# Altium PCB standos_rpi_com — копия.PcbDoc (part 1 of 2)
Units mm, origin at the board's own origin, x right, y up, seen from the top; angles counter-clockwise.
Board outline 197 x 179 mm, 2 copper layers (Top Layer, Bottom Layer); 29 components, 567 nets, 1552 pads, 0 vias.
Unrouted connection lines stored in the file: 121.
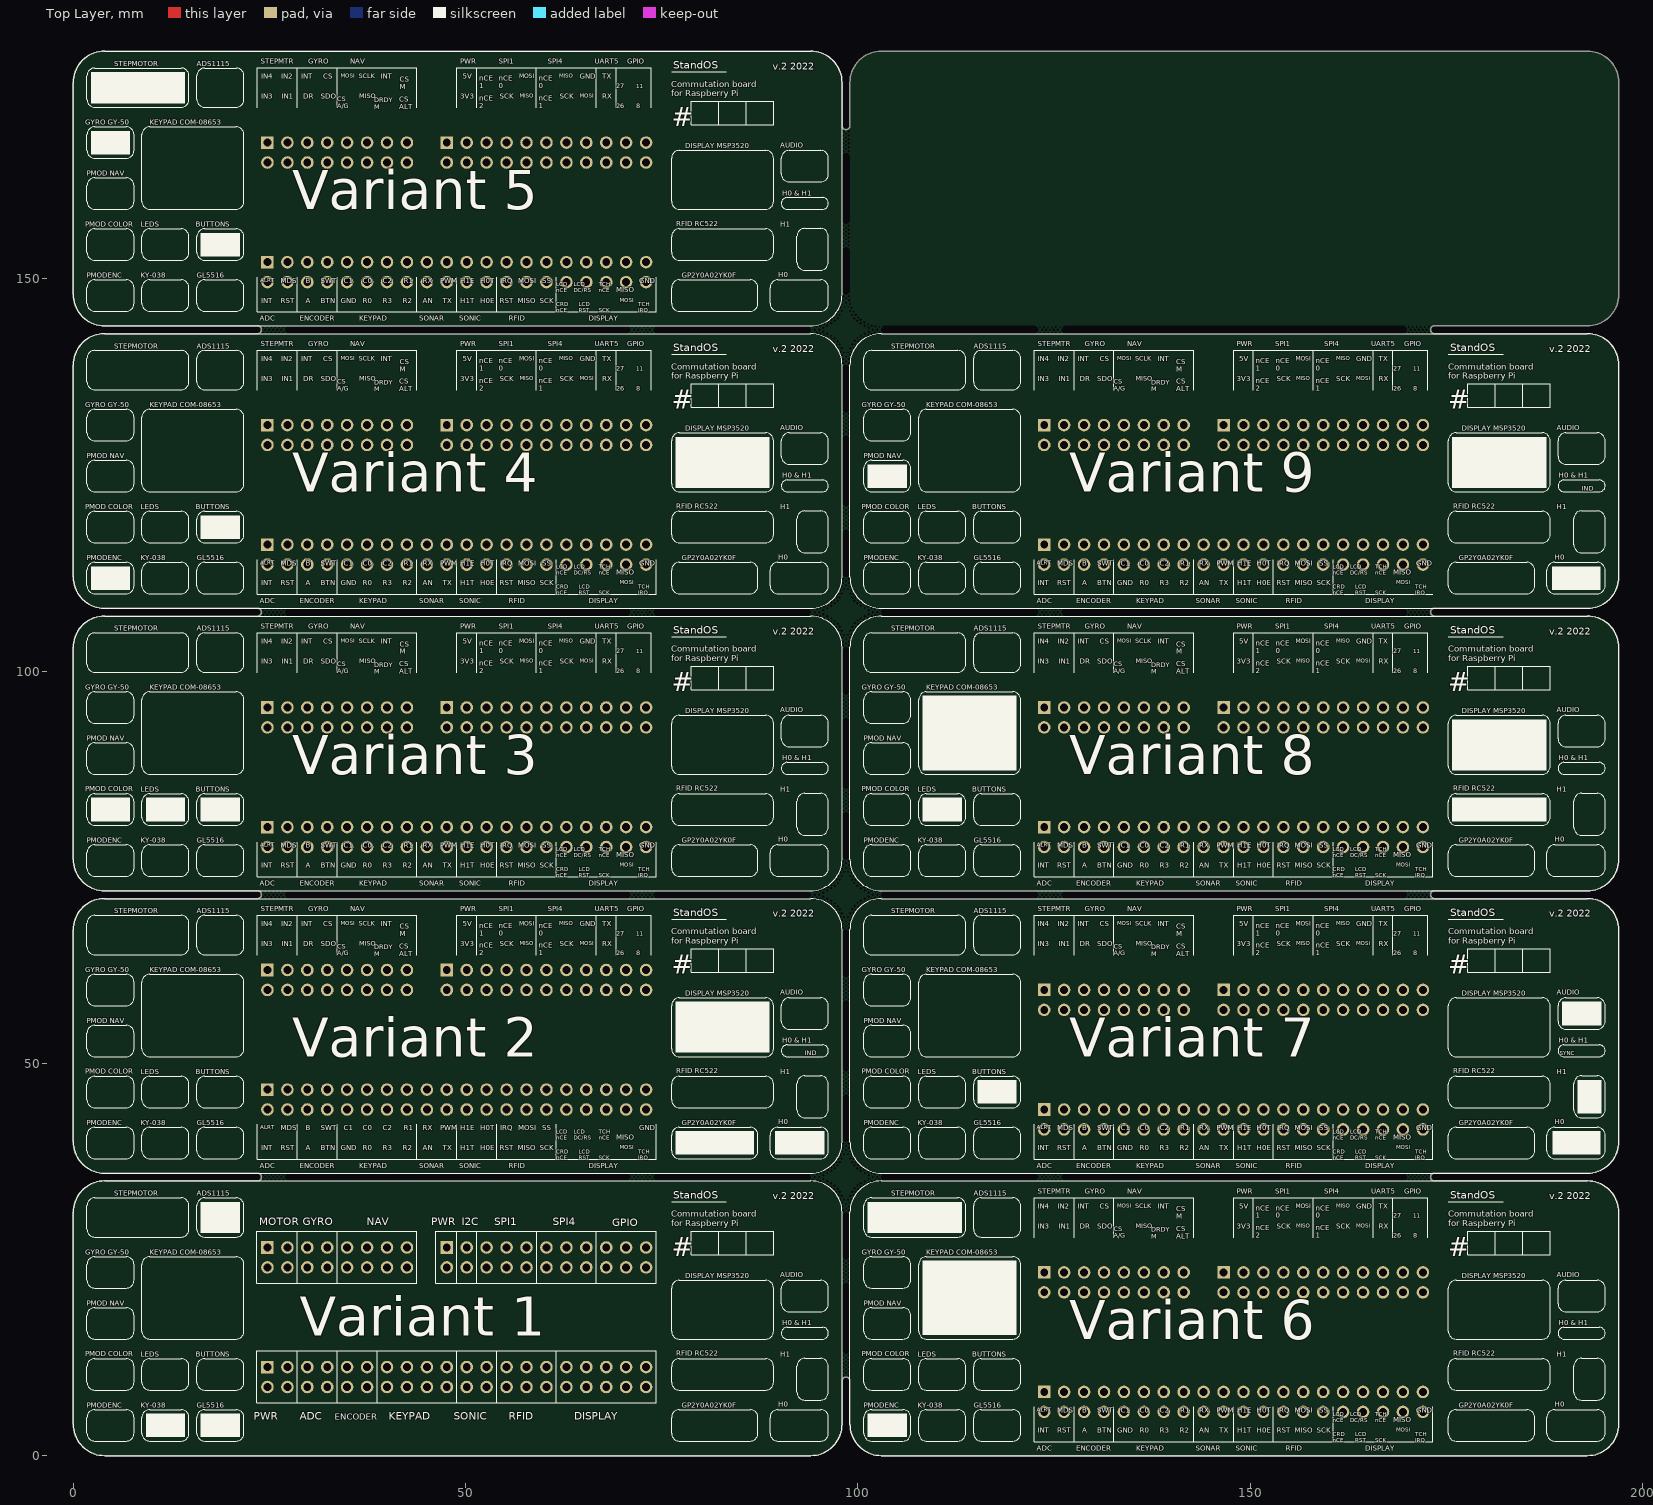
[diagram p0: Top Layer view]
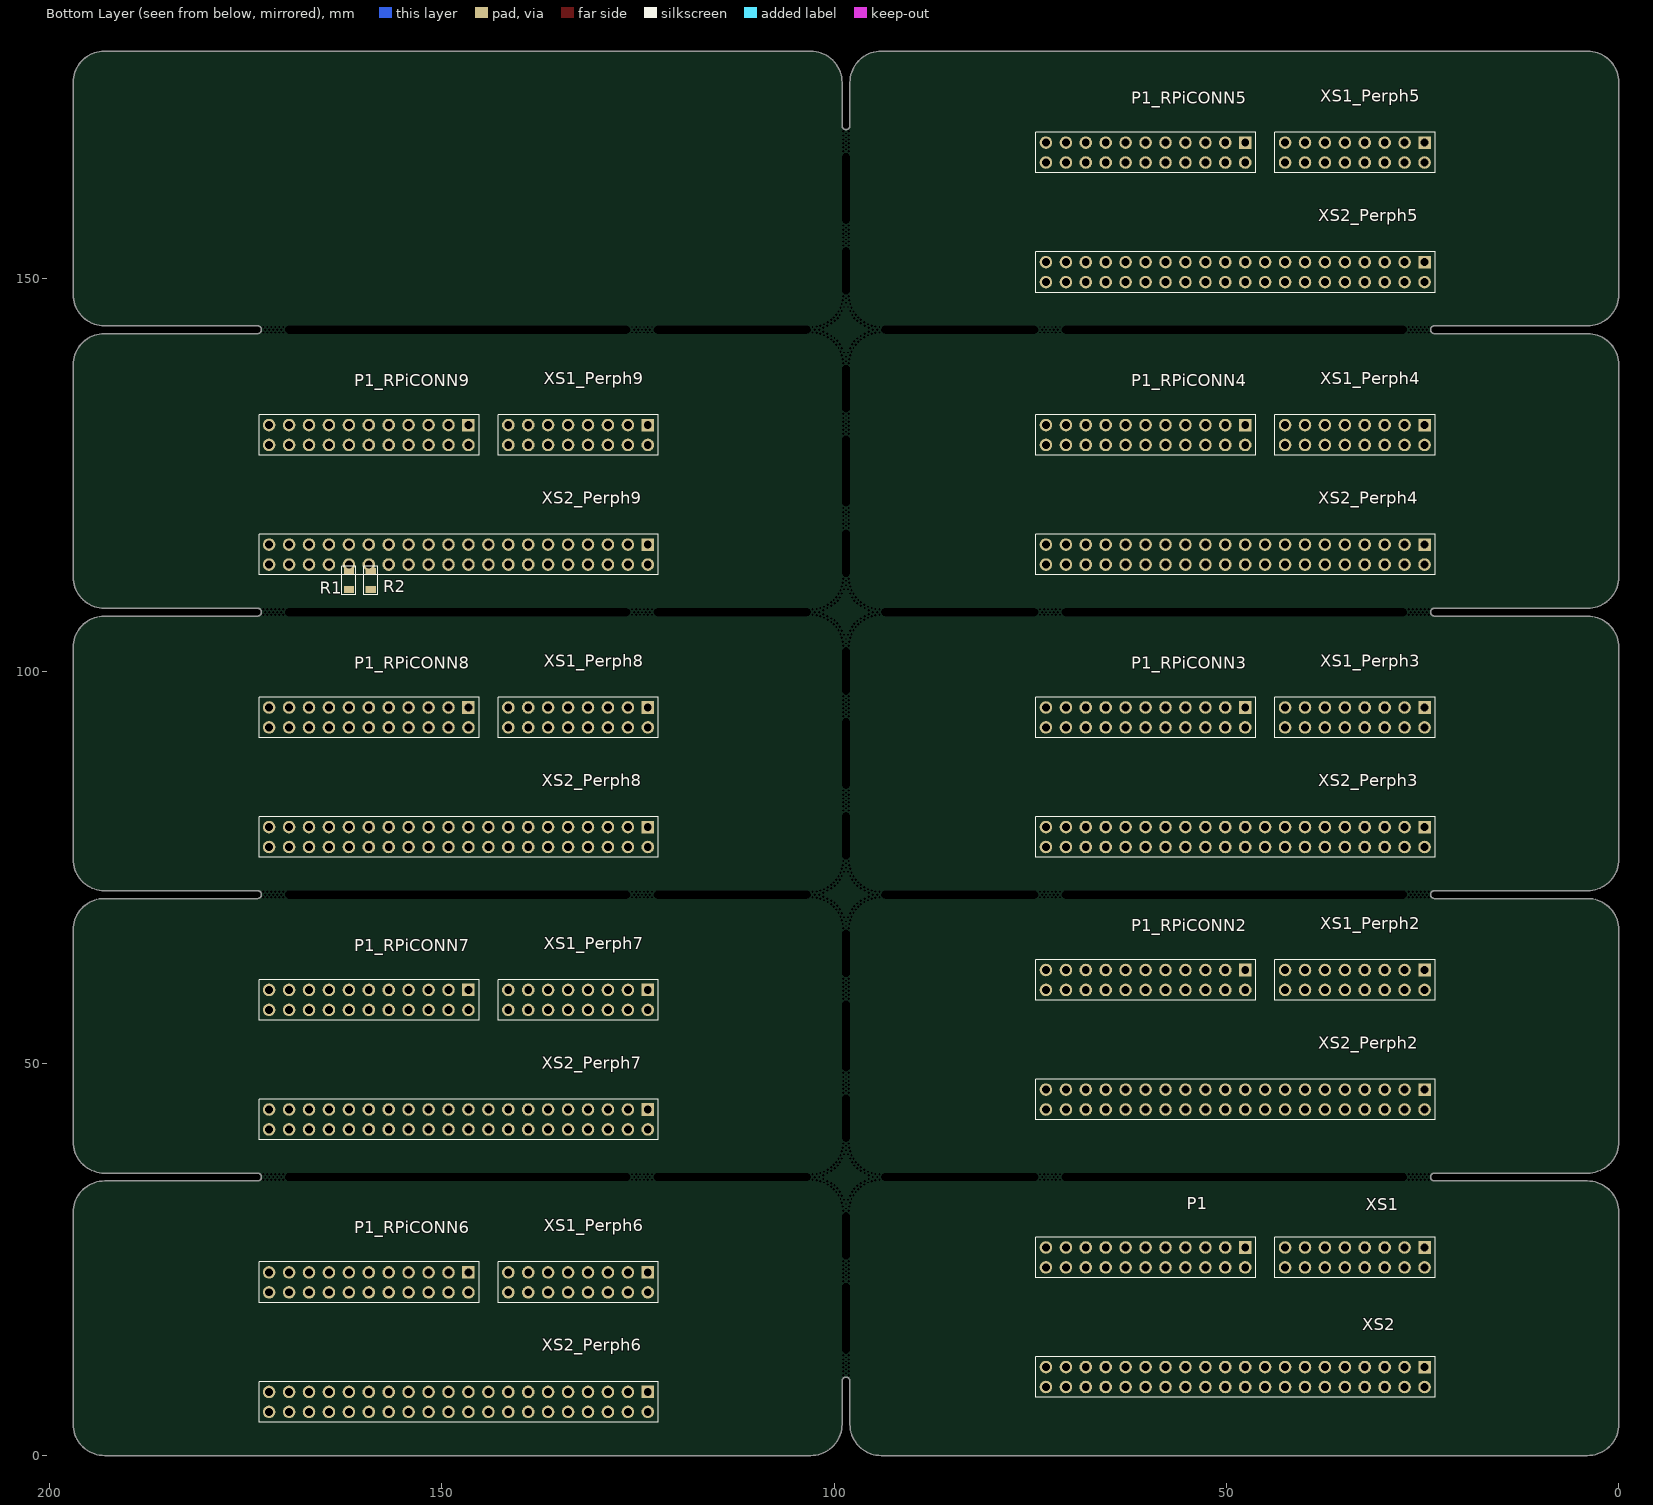
[diagram p1: Bottom Layer view, seen from below]

## Layer stack, top to bottom
Top Solder: solder mask 0.0102, Solder Resist, Dk 3.5
Top Layer: signal copper 0.0356
Dielectric 1: dielectric 0.32, FR-4, Dk 4.8
Bottom Layer: signal copper 0.0356
Bottom Solder: solder mask 0.0102, Solder Resist, Dk 3.5

## Board outline
4,0 cw(c4,4) 0,4 0,31 cw(c4,31) 4,35 23.5,35 ccw(c23.5,35.5) 23.5,36 4,36 cw(c4,40) 0,40 0,67 cw(c4,67) 4,71 23.5,71 ccw(c23.5,71.5) 23.5,72 4,72 cw(c4,76) 0,76 0,103 cw(c4,103) 4,107 23.5,107 ccw(c23.5,107.5) 23.5,108 4,108 cw(c4,112) 0,112 0,139 cw(c4,139) 4,143 23.5,143 ccw(c23.5,143.5) 23.5,144 4,144 cw(c4,148) 0,148 0,175 cw(c4,175) 4,179 94,179 cw(c94,175) 98,175 98,169.5 ccw(c98.5,169.5) 99,169.5 99,175 cw(c103,175) 103,179 193,179 cw(c193,175) 197,175 197,148 cw(c193,148) 193,144 173.5,144 ccw(c173.5,143.5) 173.5,143 193,143 cw(c193,139) 197,139 197,112 cw(c193,112) 193,108 173.5,108 ccw(c173.5,107.5) 173.5,107 193,107 cw(c193,103) 197,103 197,76 cw(c193,76) 193,72 173.5,72 ccw(c173.5,71.5) 173.5,71 193,71 cw(c193,67) 197,67 197,40 cw(c193,40) 193,36 173.5,36 ccw(c173.5,35.5) 173.5,35 193,35 cw(c193,31) 197,31 197,4 cw(c193,4) 193,0 103,0 cw(c103,4) 99,4 99,9.5 ccw(c98.5,9.5) 98,9.5 98,4 cw(c94,4) 94,0

## Design rules (kind name [scope] priority, off if disabled: settings)
Clearance [All] p1: gap=0.2 ignorepadtopadclearanceinfootprint=FALSE except(0: Arc-Hole Track-Hole SMDPad-Hole THPad-Hole Via-Hole Fill-Hole Poly-Hole Region-Hole Text-Hole)
HoleSize [All] p1: absolutevalues=TRUE maxlimit=30 minlimit=0.3 maxpercent=80.000 minpercent=20.000
HoleToHoleClearance [All] p1: gap=0.1 allowstackedmicrovias=TRUE
PolygonConnect [All] p1: connectstyle=Relief reliefconductorwidth=0.254 reliefentries=4 polygonreliefangle="90 Angle" airgapwidth=0.254
RoutingVias [All] p1: holewidth=0.3 width=0.5 viastyle="Through Hole" minholewidth=0.3 minwidth=0.5 maxholewidth=1 maxwidth=1
SilkToSilkClearance [All] p1: silktosilkclearance=0.1
SilkToSolderMaskClearance [IsPad] p1: minsilkscreentomaskgap=0.1 clearancetoexposedcopper=TRUE
SolderMaskExpansion [All] p1: expansion=0.102 istentingtop=FALSE
Width [All] p1: maxlimit=2 minlimit=0.2 preferedwidth=0.3 minimp=50.000000 maximp=50.000000 favimp=50.000000
26 further rules are at their usual default settings.

## Classes and differential pairs
component class "Variant 9": R1 R2
component class RPiCONN9: P1_RPiCONN9
component class RPiCONN8: P1_RPiCONN8
component class RPiCONN7: P1_RPiCONN7
component class RPiCONN6: P1_RPiCONN6
component class RPiCONN5: P1_RPiCONN5
component class RPiCONN4: P1_RPiCONN4
component class Perph9: XS1_Perph9 XS2_Perph9
component class Perph8: XS1_Perph8 XS2_Perph8
component class Perph7: XS1_Perph7 XS2_Perph7
component class Perph6: XS1_Perph6 XS2_Perph6
component class Perph5: XS1_Perph5 XS2_Perph5
component class Perph4: XS1_Perph4 XS2_Perph4
component class RPiCONN3: P1_RPiCONN3
component class RPiCONN1: P1
component class RPiCONN2: P1_RPiCONN2
component class Perph3: XS1_Perph3 XS2_Perph3
component class Perph2: XS1_Perph2 XS2_Perph2
channel class RPi_connector: RPiCONN1 RPiCONN2 RPiCONN3 RPiCONN4 RPiCONN5 RPiCONN6 RPiCONN7 RPiCONN8 RPiCONN9
channel class Perph_connectors: Perph1 Perph2 Perph3 Perph4 Perph5 Perph6 Perph7 Perph8 Perph9
component class Perph1: XS1 XS2

## Components (designator, comment, footprint, x,y, rotation, side; value= is the part's Value field where it differs from the comment)
P1 "PLD-22" PLD-22 47.62,26.525 r0 bottom
P1_RPiCONN2 "PLD-22" PLD-22 47.62,61.89 r0 bottom (schematic designator P1)
P1_RPiCONN3 "PLD-22" PLD-22 47.62,95.35 r0 bottom (schematic designator P1)
P1_RPiCONN4 "PLD-22" PLD-22 47.62,131.35 r0 bottom (schematic designator P1)
P1_RPiCONN5 "PLD-22" PLD-22 47.62,167.35 r0 bottom (schematic designator P1)
P1_RPiCONN6 "PLD-22" PLD-22 146.62,23.35 r0 bottom (schematic designator P1)
P1_RPiCONN7 "PLD-22" PLD-22 146.62,59.35 r0 bottom (schematic designator P1)
P1_RPiCONN8 "PLD-22" PLD-22 146.62,95.35 r0 bottom (schematic designator P1)
P1_RPiCONN9 "PLD-22" PLD-22 146.62,131.35 r0 bottom (schematic designator P1)
R1 "R0805" R0805 161.86,111.55 r270 bottom value=10K
R2 "R0805" R0805 159.06,111.55 r90 bottom value=NC
XS1 "PLD-16" PLD-16 24.76,26.525 r0 bottom
XS1_Perph2 "PLD-16" PLD-16 24.76,61.89 r0 bottom (schematic designator XS1)
XS1_Perph3 "PLD-16" PLD-16 24.76,95.35 r0 bottom (schematic designator XS1)
XS1_Perph4 "PLD-16" PLD-16 24.76,131.35 r0 bottom (schematic designator XS1)
XS1_Perph5 "PLD-16" PLD-16 24.76,167.35 r0 bottom (schematic designator XS1)
XS1_Perph6 "PLD-16" PLD-16 123.76,23.35 r0 bottom (schematic designator XS1)
XS1_Perph7 "PLD-16" PLD-16 123.76,59.35 r0 bottom (schematic designator XS1)
XS1_Perph8 "PLD-16" PLD-16 123.76,95.35 r0 bottom (schematic designator XS1)
XS1_Perph9 "PLD-16" PLD-16 123.76,131.35 r0 bottom (schematic designator XS1)
XS2 "PLD-40" PLD-40 24.76,11.285 r0 bottom
XS2_Perph2 "PLD-40" PLD-40 24.76,46.65 r0 bottom (schematic designator XS2)
XS2_Perph3 "PLD-40" PLD-40 24.76,80.11 r0 bottom (schematic designator XS2)
XS2_Perph4 "PLD-40" PLD-40 24.76,116.11 r0 bottom (schematic designator XS2)
XS2_Perph5 "PLD-40" PLD-40 24.76,152.11 r0 bottom (schematic designator XS2)
XS2_Perph6 "PLD-40" PLD-40 123.76,8.11 r0 bottom (schematic designator XS2)
XS2_Perph7 "PLD-40" PLD-40 123.76,44.11 r0 bottom (schematic designator XS2)
XS2_Perph8 "PLD-40" PLD-40 123.76,80.11 r0 bottom (schematic designator XS2)
XS2_Perph9 "PLD-40" PLD-40 123.76,116.11 r0 bottom (schematic designator XS2)

## Footprints (in the part's own frame and the unit in brackets; to place one, negate y for a bottom-side part, rotate by r counter-clockwise, add the part's x,y. Pads: shape width x height; smd on the part's side, far side on the other; paste and mask are expansions set on the pad)
PLD-16 [mm]
  rect 1.6x1.6 hole 1: 1(0,0)
  round 1.6 hole 1: 2(0,2.54) 3(2.54,0) 4(2.54,2.54) 5(5.08,0) 6(5.08,2.54) 7(7.62,0) 8(7.62,2.54) 9(10.16,0) 10(10.16,2.54) 11(12.7,0) 12(12.7,2.54) 13(15.24,0) 14(15.24,2.54) 15(17.78,0) 16(17.78,2.54)
  silkscreen extent -1.36,-1.33 19.07,3.87, body extent -1.29,-1.26 19.03,3.82, height 8.54
PLD-22 [mm]
  rect 1.6x1.6 hole 1: 1(0,0)
  round 1.6 hole 1: 2(0,2.54) 3(2.54,0) 4(2.54,2.54) 5(5.08,0) 6(5.08,2.54) 7(7.62,0) 8(7.62,2.54) 9(10.16,0) 10(10.16,2.54) 11(12.7,0) 12(12.7,2.54) 13(15.24,0) 14(15.24,2.54) 15(17.78,0) 16(17.78,2.54) 17(20.32,0) 18(20.32,2.54) 19(22.86,0) 20(22.86,2.54) 21(25.4,0) 22(25.4,2.54)
  silkscreen extent -1.36,-1.33 26.67,3.87, body extent -1.29,-1.26 26.65,3.82, height 8.54
PLD-40 [mm]
  rect 1.6x1.6 hole 1: 1(0,0)
  round 1.6 hole 1: 2(0,2.54) 3(2.54,0) 4(2.54,2.54) 5(5.08,0) 6(5.08,2.54) 7(7.62,0) 8(7.62,2.54) 9(10.16,0) 10(10.16,2.54) 11(12.7,0) 12(12.7,2.54) 13(15.24,0) 14(15.24,2.54) 15(17.78,0) 16(17.78,2.54) 17(20.32,0) 18(20.32,2.54) 19(22.86,0) 20(22.86,2.54) 21(25.4,0) 22(25.4,2.54) 23(27.94,0) 24(27.94,2.54) 25(30.48,0) 26(30.48,2.54) 27(33.02,0) 28(33.02,2.54) 29(35.56,0) 30(35.56,2.54) 31(38.1,0) 32(38.1,2.54) 33(40.64,0) 34(40.64,2.54) 35(43.18,0) 36(43.18,2.54) 37(45.72,0) 38(45.72,2.54) 39(48.26,0) 40(48.26,2.54)
  silkscreen extent -1.36,-1.33 49.55,3.87, body extent -1.29,-1.26 49.51,3.82, height 8.54
R0805 [mm]
  rect 0.9x1.3 smd: 1(-1.15,0) 2(1.15,0)
  silkscreen extent -1.8,-0.9 1.8,0.9, body extent -1.4,-0.62 1.4,0.63, height 0.8

## Free pads (board coordinates)
  round 0 hole 1 slot 44 at 0 deg unplated: 17(49,35.5) 17(49,71.5) 17(49,107.5) 17(49,143.5) 17(148,35.5) 17(148,71.5) 17(148,107.5) 17(148,143.5)
  round 0 hole 1 slot 20 at 0 deg unplated: 17(84,35.5) 17(84,71.5) 17(84,107.5) 17(84,143.5) 17(113,35.5) 17(113,71.5) 17(113,107.5) 17(113,143.5)
  round 0 hole 1 slot 9 at 90 deg unplated: 17(98.5,17.5) 17(98.5,53.5) 17(98.5,89.5) 17(98.5,125.5) 17(98.5,161.5)
  round 0 hole 1 slot 6 at 90 deg unplated: 17(98.5,28) 17(98.5,43) 17(98.5,64) 17(98.5,79) 17(98.5,100) 17(98.5,115) 17(98.5,136) 17(98.5,151)
  round 0 hole 0.3 unplated mask+0.102: ""(24.225,35.15) ""(24.225,35.85) ""(24.225,71.15) ""(24.225,71.85) ""(24.225,107.15) ""(24.225,107.85) ""(24.225,143.15) ""(24.225,143.85) ""(24.5,35.501) ""(24.5,71.501) ""(24.5,107.501) ""(24.5,143.501) ""(24.75,35.15) ""(24.75,35.85) ""(24.75,71.15) ""(24.75,71.85) ""(24.75,107.15) ""(24.75,107.85) ""(24.75,143.15) ""(24.75,143.85) ""(25,35.501) ""(25,71.501) ""(25,107.501) ""(25,143.501) ""(25.25,35.15) ""(25.25,35.85) ""(25.25,71.15) ""(25.25,71.85) ""(25.25,107.15) ""(25.25,107.85) ""(25.25,143.15) ""(25.25,143.85) ""(25.5,35.501) ""(25.5,71.501) ""(25.5,107.501) ""(25.5,143.501) ""(25.75,35.15) ""(25.75,35.85) ""(25.75,71.15) ""(25.75,71.85) ""(25.75,107.15) ""(25.75,107.85) ""(25.75,143.15) ""(25.75,143.85) ""(26,35.501) ""(26,71.501) ""(26,107.501) ""(26,143.501) ""(26.25,35.15) ""(26.25,35.85) ""(26.25,71.15) ""(26.25,71.85) ""(26.25,107.15) ""(26.25,107.85) ""(26.25,143.15) ""(26.25,143.85) ""(26.5,35.501) ""(26.5,71.501) ""(26.5,107.501) ""(26.5,143.501) ""(26.775,35.15) ""(26.775,35.85) ""(26.775,71.15) ""(26.775,71.85) ""(26.775,107.15) ""(26.775,107.85) ""(26.775,143.15) ""(26.775,143.85) ""(71.225,35.15) ""(71.225,35.85) ""(71.225,71.15) ""(71.225,71.85) ""(71.225,107.15) ""(71.225,107.85) ""(71.225,143.15) ""(71.225,143.85) ""(71.5,35.501) ""(71.5,71.501) ""(71.5,107.501) ""(71.5,143.501) ""(71.75,35.15) ""(71.75,35.85) ""(71.75,71.15) ""(71.75,71.85) ""(71.75,107.15) ""(71.75,107.85) ""(71.75,143.15) ""(71.75,143.85) ""(72,35.501) ""(72,71.501) ""(72,107.501) ""(72,143.501) ""(72.25,35.15) ""(72.25,35.85) ""(72.25,71.15) ""(72.25,71.85) ""(72.25,107.15) ""(72.25,107.85) ""(72.25,143.15) ""(72.25,143.85) ""(72.5,35.501) ""(72.5,71.501) ""(72.5,107.501) ""(72.5,143.501) ""(72.75,35.15) ""(72.75,35.85) ""(72.75,71.15) ""(72.75,71.85) ""(72.75,107.15) ""(72.75,107.85) ""(72.75,143.15) ""(72.75,143.85) ""(73,35.501) ""(73,71.501) ""(73,107.501) ""(73,143.501) ""(73.25,35.15) ""(73.25,35.85) ""(73.25,71.15) ""(73.25,71.85) ""(73.25,107.15) ""(73.25,107.85) ""(73.25,143.15) ""(73.25,143.85) ""(73.5,35.501) ""(73.5,71.501) ""(73.5,107.501) ""(73.5,143.501) ""(73.775,35.15) ""(73.775,35.85) ""(73.775,71.15) ""(73.775,71.85) ""(73.775,107.15) ""(73.775,107.85) ""(73.775,143.15) ""(73.775,143.85) ""(94.225,35.15) ""(94.225,35.85) ""(94.225,71.15) ""(94.225,71.85) ""(94.225,107.15) ""(94.225,107.85) ""(94.225,143.15) ""(94.225,143.85) ""(94.5,35.501) ""(94.5,71.501) ""(94.5,107.501) ""(94.5,143.501) ""(94.75,35.1) ""(94.75,35.9) ""(94.75,71.1) ""(94.75,71.9) ""(94.75,107.1) ""(94.75,107.9) ""(94.75,143.1) ""(94.75,143.9) ""(95.075,35.5) ""(95.075,71.5) ""(95.075,107.5) ""(95.075,143.5) ""(95.225,34.975) ""(95.225,36.025) ""(95.225,70.975) ""(95.225,72.025) ""(95.225,106.975) ""(95.225,108.025) ""(95.225,142.975) ""(95.225,144.025) ""(95.6,35.25) ""(95.6,35.75) ""(95.6,71.25) ""(95.6,71.75) ""(95.6,107.25) ""(95.6,107.75) ""(95.6,143.25) ""(95.6,143.75) ""(95.7,34.8) ""(95.7,36.2) ""(95.7,70.8) ""(95.7,72.2) ""(95.7,106.8) ""(95.7,108.2) ""(95.7,142.8) ""(95.7,144.2) ""(96.125,34.975) ""(96.125,36.025) ""(96.125,70.975) ""(96.125,72.025) ""(96.125,106.975) ""(96.125,108.025) ""(96.125,142.975) ""(96.125,144.025) ""(96.175,34.55) ""(96.175,36.45) ""(96.175,70.55) ""(96.175,72.45) ""(96.175,106.55) ""(96.175,108.45) ""(96.175,142.55) ""(96.175,144.45) ""(96.6,34.25) ""(96.6,36.75) ""(96.6,70.25) ""(96.6,70.25) ""(96.6,72.75) ""(96.6,106.25) ""(96.6,108.75) ""(96.6,142.25) ""(96.6,142.25) ""(96.6,144.75) ""(96.6,178.25) ""(96.625,34.7) ""(96.625,36.3) ""(96.625,70.7) ""(96.625,72.3) ""(96.625,106.7) ""(96.625,108.3) ""(96.625,142.7) ""(96.625,144.3) ""(96.95,33.95) ""(96.95,37.05) ""(96.95,69.95) ""(96.95,73.05) ""(96.95,105.95) ""(96.95,109.05) ""(96.95,141.95) ""(96.95,145.05) ""(97.075,34.375) ""(97.075,36.625) ""(97.075,70.375) ""(97.075,72.625) ""(97.075,106.375) ""(97.075,108.625) ""(97.075,142.375) ""(97.075,144.625) ""(97.25,33.6) ""(97.25,37.4) ""(97.25,69.6) ""(97.25,73.4) ""(97.25,105.6) ""(97.25,109.4) ""(97.25,141.6) ""(97.25,145.4) ""(97.45,34.025) ""(97.45,36.975) ""(97.45,70.025) ""(97.45,72.975) ""(97.45,106.025) ""(97.45,108.975) ""(97.45,142.025) ""(97.45,144.975) ""(97.55,33.175) ""(97.55,37.825) ""(97.55,69.175) ""(97.55,73.825) ""(97.55,105.175) ""(97.55,109.825) ""(97.55,141.175) ""(97.55,145.825) ""(97.7,33.625) ""(97.7,37.375) ""(97.7,69.625) ""(97.7,73.375) ""(97.7,105.625) ""(97.7,109.375) ""(97.7,141.625) ""(97.7,145.375) ""(97.8,32.7) ""(97.8,38.3) ""(97.8,68.7) ""(97.8,74.3) ""(97.8,104.7) ""(97.8,110.3) ""(97.8,140.7) ""(97.8,146.3) ""(97.975,32.225) ""(97.975,33.125) ""(97.975,37.875) ""(97.975,38.775) ""(97.975,68.225) ""(97.975,69.125) ""(97.975,73.875) ""(97.975,74.775) ""(97.975,104.225) ""(97.975,105.125) ""(97.975,109.875) ""(97.975,110.775) ""(97.975,140.225) ""(97.975,141.125) ""(97.975,145.875) ""(97.975,146.775) ""(98.1,31.75) ""(98.1,39.25) ""(98.1,67.75) ""(98.1,75.25) ""(98.1,103.75) ""(98.1,111.25) ""(98.1,139.75) ""(98.1,147.25) ""(98.15,10.225) ""(98.15,10.75) ""(98.15,11.25) ""(98.15,11.75) ""(98.15,12.25) ""(98.15,12.775) ""(98.15,22.225) ""(98.15,22.75) ""(98.15,23.25) ""(98.15,23.75) ""(98.15,24.25) ""(98.15,24.775) ""(98.15,31.225) ""(98.15,39.775) ""(98.15,46.225) ""(98.15,46.75) ""(98.15,47.25) ""(98.15,47.75) ""(98.15,48.25) ""(98.15,48.775) ""(98.15,58.225) ""(98.15,58.75) ""(98.15,59.25) ""(98.15,59.75) ""(98.15,60.25) ""(98.15,60.775) ""(98.15,67.225) ""(98.15,75.775) ""(98.15,82.225) ""(98.15,82.75) ""(98.15,83.25) ""(98.15,83.75) ""(98.15,84.25) ""(98.15,84.775) ""(98.15,94.225) ""(98.15,94.75) ""(98.15,95.25) ""(98.15,95.75) ""(98.15,96.25) ""(98.15,96.775) ""(98.15,103.225) ""(98.15,111.775) ""(98.15,118.225) ""(98.15,118.75) ""(98.15,119.25) ""(98.15,119.75) ""(98.15,120.25) ""(98.15,120.775) ""(98.15,130.225) ""(98.15,130.75) ""(98.15,131.25) ""(98.15,131.75) ""(98.15,132.25) ""(98.15,132.775) ""(98.15,139.225) ""(98.15,147.775) ""(98.15,154.225) ""(98.15,154.75) ""(98.15,155.25) ""(98.15,155.75) ""(98.15,156.25) ""(98.15,156.775) ""(98.15,166.225) ""(98.15,166.75) ""(98.15,167.25) ""(98.15,167.75) ""(98.15,168.25) ""(98.15,168.775) ""(98.25,32.6) ""(98.25,38.4) ""(98.25,68.6) ""(98.25,74.4) ""(98.25,104.6) ""(98.25,110.4) ""(98.25,140.6) ""(98.25,146.4) ""(98.499,10.5) ""(98.499,11) ""(98.499,11.5) ""(98.499,12) ""(98.499,12.5) ""(98.499,22.5) ""(98.499,23) ""(98.499,23.5) ""(98.499,24) ""(98.499,24.5) ""(98.499,31.5) ""(98.499,39.5) ""(98.499,46.5) ""(98.499,47) ""(98.499,47.5) ""(98.499,48) ""(98.499,48.5) ""(98.499,58.5) ""(98.499,59) ""(98.499,59.5) ""(98.499,60) ""(98.499,60.5) ""(98.499,67.5) ""(98.499,75.5) ""(98.499,82.5) ""(98.499,83) ""(98.499,83.5) ""(98.499,84) ""(98.499,84.5) ""(98.499,94.5) ""(98.499,95) ""(98.499,95.5) ""(98.499,96) ""(98.499,96.5) ""(98.499,103.5) ""(98.499,111.5) ""(98.499,118.5) ""(98.499,119) ""(98.499,119.5) ""(98.499,120) ""(98.499,120.5) ""(98.499,130.5) ""(98.499,131) ""(98.499,131.5) ""(98.499,132) ""(98.499,132.5) ""(98.499,139.5) ""(98.499,147.5) ""(98.499,154.5) ""(98.499,155) ""(98.499,155.5) ""(98.499,156) ""(98.499,156.5) ""(98.499,166.5) ""(98.499,167) ""(98.499,167.5) ""(98.499,168) ""(98.499,168.5) ""(98.5,32.075) ""(98.5,38.925) ""(98.5,68.075) ""(98.5,74.925) ""(98.5,104.075) ""(98.5,110.925) ""(98.5,140.075) ""(98.5,146.925) ""(98.75,32.6) ""(98.75,38.4) ""(98.75,68.6) ""(98.75,74.4) ""(98.75,104.6) ""(98.75,110.4) ""(98.75,140.6) ""(98.75,146.4) ""(98.85,10.225) ""(98.85,10.75) ""(98.85,11.25) ""(98.85,11.75) ""(98.85,12.25) ""(98.85,12.775) ""(98.85,22.225) ""(98.85,22.75) ""(98.85,23.25) ""(98.85,23.75) ""(98.85,24.25) ""(98.85,24.775) ""(98.85,46.225) ""(98.85,46.75) ""(98.85,47.25) ""(98.85,47.75) ""(98.85,48.25) ""(98.85,48.775) ""(98.85,58.225) ""(98.85,58.75) ""(98.85,59.25) ""(98.85,59.75) ""(98.85,60.25) ""(98.85,60.775) ""(98.85,82.225) ""(98.85,82.75) ""(98.85,83.25) ""(98.85,83.75) ""(98.85,84.25) ""(98.85,84.775) ""(98.85,94.225) ""(98.85,94.75) ""(98.85,95.25) ""(98.85,95.75) ""(98.85,96.25) ""(98.85,96.775) ""(98.85,118.225) ""(98.85,118.75) ""(98.85,119.25) ""(98.85,119.75) ""(98.85,120.25) ""(98.85,120.775) ""(98.85,130.225) ""(98.85,130.75) ""(98.85,131.25) ""(98.85,131.75) ""(98.85,132.25) ""(98.85,132.775) ""(98.85,154.225) ""(98.85,154.75) ""(98.85,155.25) ""(98.85,155.75) ""(98.85,156.25) ""(98.85,156.775) ""(98.85,166.225) ""(98.85,166.75) ""(98.85,167.25) ""(98.85,167.75) ""(98.85,168.25) ""(98.85,168.775) ""(98.85,31.225) ""(98.85,39.775) ""(98.85,67.225) ""(98.85,75.775) ""(98.85,103.225) ""(98.85,111.775) ""(98.85,139.225) ""(98.85,147.775) ""(98.9,31.75) ""(98.9,39.25) ""(98.9,67.75) ""(98.9,75.25) ""(98.9,103.75) ""(98.9,111.25) ""(98.9,139.75) ""(98.9,147.25) ""(99.025,32.225) ""(99.025,33.125) ""(99.025,37.875) ""(99.025,38.775) ""(99.025,68.225) ""(99.025,69.125) ""(99.025,73.875) ""(99.025,74.775) ""(99.025,104.225) ""(99.025,105.125) ""(99.025,109.875) ""(99.025,110.775) ""(99.025,140.225) ""(99.025,141.125) ""(99.025,145.875) ""(99.025,146.775) ""(99.2,32.7) ""(99.2,38.3) ""(99.2,68.7) ""(99.2,74.3) ""(99.2,104.7) ""(99.2,110.3) ""(99.2,140.7) ""(99.2,146.3) ""(99.3,33.625) ""(99.3,37.375) ""(99.3,69.625) ""(99.3,73.375) ""(99.3,105.625) ""(99.3,109.375) ""(99.3,141.625) ""(99.3,145.375) ""(99.45,33.175) ""(99.45,37.825) ""(99.45,69.175) ""(99.45,73.825) ""(99.45,105.175) ""(99.45,109.825) ""(99.45,141.175) ""(99.45,145.825) ""(99.55,36.975) ""(99.55,72.975) ""(99.55,108.975) ""(99.55,144.975) ""(99.625,34.075) ""(99.625,70.075) ""(99.625,106.075) ""(99.625,142.075) ""(99.75,33.6) ""(99.75,37.4) ""(99.75,69.6) ""(99.75,73.4) ""(99.75,105.6) ""(99.75,109.4) ""(99.75,141.6) ""(99.75,145.4) ""(99.925,36.625) ""(99.925,72.625) ""(99.925,108.625) ""(99.925,144.625) ""(99.975,34.45) ""(99.975,70.45) ""(99.975,106.45) ""(99.975,142.45) ""(100.05,33.95) ""(100.05,37.05) ""(100.05,69.95) ""(100.05,73.05) ""(100.05,105.95) ""(100.05,109.05) ""(100.05,141.95) ""(100.05,145.05) ""(100.375,36.3) ""(100.375,72.3) ""(100.375,108.3) ""(100.375,144.3) ""(100.375,34.7) ""(100.375,70.7) ""(100.375,106.7) ""(100.375,142.7) ""(100.4,36.75) ""(100.4,72.75) ""(100.4,108.75) ""(100.4,144.75) ""(100.4,34.25) ""(100.4,70.25) ""(100.4,106.25) ""(100.4,142.25) ""(100.825,36.45) ""(100.825,72.45) ""(100.825,108.45) ""(100.825,144.45) ""(100.825,34.55) ""(100.825,70.55) ""(100.825,106.55) ""(100.825,142.55) ""(100.875,36.025) ""(100.875,72.025) ""(100.875,108.025) ""(100.875,144.025) ""(100.875,34.975) ""(100.875,70.975) ""(100.875,106.975) ""(100.875,142.975) ""(101.3,36.2) ""(101.3,72.2) ""(101.3,108.2) ""(101.3,144.2) ""(101.3,34.8) ""(101.3,70.8) ""(101.3,106.8) ""(101.3,142.8) ""(101.4,35.75) ""(101.4,71.75) ""(101.4,107.75) ""(101.4,143.75) ""(101.4,35.25) ""(101.4,71.25) ""(101.4,107.25) ""(101.4,143.25) ""(101.775,36.025) ""(101.775,72.025) ""(101.775,108.025) ""(101.775,144.025) ""(101.775,34.975) ""(101.775,70.975) ""(101.775,106.975) ""(101.775,142.975) ""(101.925,35.5) ""(101.925,71.5) ""(101.925,107.5) ""(101.925,143.5) ""(102.25,35.9) ""(102.25,71.9) ""(102.25,107.9) ""(102.25,143.9) ""(102.25,35.1) ""(102.25,71.1) ""(102.25,107.1) ""(102.25,143.1) ""(102.5,35.499) ""(102.5,71.499) ""(102.5,107.499) ""(102.5,143.499) ""(102.775,35.85) ""(102.775,71.85) ""(102.775,107.85) ""(102.775,143.85) ""(102.775,35.15) ""(102.775,71.15) ""(102.775,107.15) ""(102.775,143.15) ""(123.225,35.15) ""(123.225,35.85) ""(123.225,71.15) ""(123.225,71.85) ""(123.225,107.15) ""(123.225,107.85) ""(123.225,143.15) ""(123.225,143.85) ""(123.5,35.501) ""(123.5,71.501) ""(123.5,107.501) ""(123.5,143.501) ""(123.75,35.15) ""(123.75,35.85) ""(123.75,71.15) ""(123.75,71.85) ""(123.75,107.15) ""(123.75,107.85) ""(123.75,143.15) ""(123.75,143.85) ""(124,35.501) ""(124,71.501) ""(124,107.501) ""(124,143.501) ""(124.25,35.15) ""(124.25,35.85) ""(124.25,71.15) ""(124.25,71.85) ""(124.25,107.15) ""(124.25,107.85) ""(124.25,143.15) ""(124.25,143.85) ""(124.5,35.501) ""(124.5,71.501) ""(124.5,107.501) ""(124.5,143.501) ""(124.75,35.15) ""(124.75,35.85) ""(124.75,71.15) ""(124.75,71.85) ""(124.75,107.15) ""(124.75,107.85) ""(124.75,143.15) ""(124.75,143.85) ""(125,35.501) ""(125,71.501) ""(125,107.501) ""(125,143.501) ""(125.25,35.15) ""(125.25,35.85) ""(125.25,71.15) ""(125.25,71.85) ""(125.25,107.15) ""(125.25,107.85) ""(125.25,143.15) ""(125.25,143.85) ""(125.5,35.501) ""(125.5,71.501) ""(125.5,107.501) ""(125.5,143.501) ""(125.775,35.15) ""(125.775,35.85) ""(125.775,71.15) ""(125.775,71.85) ""(125.775,107.15) ""(125.775,107.85) ""(125.775,143.15) ""(125.775,143.85) ""(170.225,35.15) ""(170.225,35.85) ""(170.225,71.15) ""(170.225,71.85) ""(170.225,107.15) ""(170.225,107.85) ""(170.225,143.15) ""(170.225,143.85) ""(170.5,35.501) ""(170.5,71.501) ""(170.5,107.501) ""(170.5,143.501) ""(170.75,35.15) ""(170.75,35.85) ""(170.75,71.15) ""(170.75,71.85) ""(170.75,107.15) ""(170.75,107.85) ""(170.75,143.15) ""(170.75,143.85) ""(171,35.501) ""(171,71.501) ""(171,107.501) ""(171,143.501) ""(171.25,35.15) ""(171.25,35.85) ""(171.25,71.15) ""(171.25,71.85) ""(171.25,107.15) ""(171.25,107.85) ""(171.25,143.15) ""(171.25,143.85) ""(171.5,35.501) ""(171.5,71.501) ""(171.5,107.501) ""(171.5,143.501) ""(171.75,35.15) ""(171.75,35.85) ""(171.75,71.15) ""(171.75,71.85) ""(171.75,107.15) ""(171.75,107.85) ""(171.75,143.15) ""(171.75,143.85) ""(172,35.501) ""(172,71.501) ""(172,107.501) ""(172,143.501) ""(172.25,35.15) ""(172.25,35.85) ""(172.25,71.15) ""(172.25,71.85) ""(172.25,107.15) ""(172.25,107.85) ""(172.25,143.15) ""(172.25,143.85) ""(172.5,35.501) ""(172.5,71.501) ""(172.5,107.501) ""(172.5,143.501) ""(172.775,35.15) ""(172.775,35.85) ""(172.775,71.15) ""(172.775,71.85) ""(172.775,107.15) ""(172.775,107.85) ""(172.775,143.15) ""(172.775,143.85) ""(195.6,34.25) ""(195.6,70.25) ""(195.6,106.25) ""(195.6,142.25)

## Nets (pads, with @x,y where several pads share a name; then routed paths per layer and width w, separated by ;. In a path a pad name is that pad's centre, name@x,y a point inside that pad or via, vN(x,y) a via of type N, cw(c..) or ccw(c..) an arc to the next point about the centre after c; other vN are vias at no path point)
3V3?: R1.1
ADC.ALRT_Perph1: P1.21 XS2.6
ADC.ALRT_Perph2: XS2_Perph2.6
ADC.ALRT_Perph3: XS2_Perph3.6
ADC.ALRT_Perph4: XS2_Perph4.6
ADC.ALRT_Perph5: XS2_Perph5.6
ADC.ALRT_Perph6: XS2_Perph6.6
ADC.ALRT_Perph7: XS2_Perph7.6
ADC.ALRT_Perph8: XS2_Perph8.6
ADC.ALRT_Perph9: XS2_Perph9.6
COLORSENSOR.INT_Perph1: XS2.5
COLORSENSOR.INT_Perph2: XS2_Perph2.5
COLORSENSOR.INT_Perph3: P1_RPiCONN3.22 XS2_Perph3.5
COLORSENSOR.INT_Perph4: XS2_Perph4.5
COLORSENSOR.INT_Perph5: XS2_Perph5.5
COLORSENSOR.INT_Perph6: XS2_Perph6.5
COLORSENSOR.INT_Perph7: XS2_Perph7.5
COLORSENSOR.INT_Perph8: XS2_Perph8.5
COLORSENSOR.INT_Perph9: XS2_Perph9.5
COLORSENSOR.RST_Perph1: XS2.7
COLORSENSOR.RST_Perph2: XS2_Perph2.7
COLORSENSOR.RST_Perph3: P1_RPiCONN3.21 XS2_Perph3.7
COLORSENSOR.RST_Perph4: XS2_Perph4.7
COLORSENSOR.RST_Perph5: XS2_Perph5.7
COLORSENSOR.RST_Perph6: XS2_Perph6.7
COLORSENSOR.RST_Perph7: XS2_Perph7.7
COLORSENSOR.RST_Perph8: XS2_Perph8.7
COLORSENSOR.RST_Perph9: XS2_Perph9.7
DISPLAY.LCD.DC/RS_Perph1: XS2.33
DISPLAY.LCD.DC/RS_Perph2: P1_RPiCONN2.16 XS2_Perph2.33
DISPLAY.LCD.DC/RS_Perph3: XS2_Perph3.33
DISPLAY.LCD.DC/RS_Perph4: P1_RPiCONN4.16 XS2_Perph4.33
DISPLAY.LCD.DC/RS_Perph5: XS2_Perph5.33
DISPLAY.LCD.DC/RS_Perph6: XS2_Perph6.33
DISPLAY.LCD.DC/RS_Perph7: XS2_Perph7.33
DISPLAY.LCD.DC/RS_Perph8: P1_RPiCONN8.19 XS2_Perph8.33
DISPLAY.LCD.DC/RS_Perph9: P1_RPiCONN9.19 XS2_Perph9.33
DISPLAY.LCD.RESET_Perph1: XS2.34
DISPLAY.LCD.RESET_Perph2: P1_RPiCONN2.13 XS2_Perph2.34
DISPLAY.LCD.RESET_Perph3: XS2_Perph3.34
DISPLAY.LCD.RESET_Perph4: P1_RPiCONN4.13 XS2_Perph4.34
DISPLAY.LCD.RESET_Perph5: XS2_Perph5.34
DISPLAY.LCD.RESET_Perph6: XS2_Perph6.34
DISPLAY.LCD.RESET_Perph7: XS2_Perph7.34
DISPLAY.LCD.RESET_Perph8: P1_RPiCONN8.20 XS2_Perph8.34
DISPLAY.LCD.RESET_Perph9: R1.2 R2.1 XS2_Perph9.34
DISPLAY.LCD.SPI.MISO_Perph1: XS2.37
DISPLAY.LCD.SPI.MISO_Perph2: P1_RPiCONN2.10 XS2_Perph2.37
DISPLAY.LCD.SPI.MISO_Perph3: XS2_Perph3.37
DISPLAY.LCD.SPI.MISO_Perph4: P1_RPiCONN4.10 XS2_Perph4.37
DISPLAY.LCD.SPI.MISO_Perph5: XS2_Perph5.37
DISPLAY.LCD.SPI.MISO_Perph6: XS2_Perph6.37
DISPLAY.LCD.SPI.MISO_Perph7: XS2_Perph7.37
DISPLAY.LCD.SPI.MISO_Perph8: P1_RPiCONN8.10 XS2_Perph8.28 XS2_Perph8.37
DISPLAY.LCD.SPI.MISO_Perph9: P1_RPiCONN9.13 XS2_Perph9.37
DISPLAY.LCD.SPI.MOSI_Perph1: XS2.38
DISPLAY.LCD.SPI.MOSI_Perph2: P1_RPiCONN2.9 XS2_Perph2.38
DISPLAY.LCD.SPI.MOSI_Perph3: XS2_Perph3.38
DISPLAY.LCD.SPI.MOSI_Perph4: P1_RPiCONN4.9 XS2_Perph4.38
DISPLAY.LCD.SPI.MOSI_Perph5: XS2_Perph5.38
DISPLAY.LCD.SPI.MOSI_Perph6: XS2_Perph6.38
DISPLAY.LCD.SPI.MOSI_Perph7: XS2_Perph7.38
DISPLAY.LCD.SPI.MOSI_Perph8: P1_RPiCONN8.9 XS2_Perph8.27 XS2_Perph8.38
DISPLAY.LCD.SPI.MOSI_Perph9: P1_RPiCONN9.16 XS2_Perph9.38
DISPLAY.LCD.SPI.nCE_Perph1: XS2.31
DISPLAY.LCD.SPI.nCE_Perph2: P1_RPiCONN2.7 XS2_Perph2.31
DISPLAY.LCD.SPI.nCE_Perph3: XS2_Perph3.31
DISPLAY.LCD.SPI.nCE_Perph4: P1_RPiCONN4.7 XS2_Perph4.31
DISPLAY.LCD.SPI.nCE_Perph5: XS2_Perph5.31
DISPLAY.LCD.SPI.nCE_Perph6: XS2_Perph6.31
DISPLAY.LCD.SPI.nCE_Perph7: XS2_Perph7.31
DISPLAY.LCD.SPI.nCE_Perph8: P1_RPiCONN8.7 XS2_Perph8.31
DISPLAY.LCD.SPI.nCE_Perph9: P1_RPiCONN9.11 XS2_Perph9.31
DISPLAY.LCD.SPI.SCLK_Perph1: XS2.36
DISPLAY.LCD.SPI.SCLK_Perph2: P1_RPiCONN2.8 XS2_Perph2.36
DISPLAY.LCD.SPI.SCLK_Perph3: XS2_Perph3.36
DISPLAY.LCD.SPI.SCLK_Perph4: P1_RPiCONN4.8 XS2_Perph4.36
DISPLAY.LCD.SPI.SCLK_Perph5: XS2_Perph5.36
DISPLAY.LCD.SPI.SCLK_Perph6: XS2_Perph6.36
DISPLAY.LCD.SPI.SCLK_Perph7: XS2_Perph7.36
DISPLAY.LCD.SPI.SCLK_Perph8: P1_RPiCONN8.8 XS2_Perph8.30 XS2_Perph8.36
DISPLAY.LCD.SPI.SCLK_Perph9: P1_RPiCONN9.14 XS2_Perph9.36
DISPLAY.SDCARD.nCE_Perph1: XS2.32
DISPLAY.SDCARD.nCE_Perph2: P1_RPiCONN2.6 XS2_Perph2.32
DISPLAY.SDCARD.nCE_Perph3: XS2_Perph3.32
DISPLAY.SDCARD.nCE_Perph4: P1_RPiCONN4.6 XS2_Perph4.32
DISPLAY.SDCARD.nCE_Perph5: XS2_Perph5.32
DISPLAY.SDCARD.nCE_Perph6: XS2_Perph6.32
DISPLAY.SDCARD.nCE_Perph7: XS2_Perph7.32
DISPLAY.SDCARD.nCE_Perph8: P1_RPiCONN8.6 XS2_Perph8.32
DISPLAY.SDCARD.nCE_Perph9: XS2_Perph9.32
DISPLAY.TOUCH.IRQ_Perph1: XS2.40
DISPLAY.TOUCH.IRQ_Perph2: P1_RPiCONN2.14 XS2_Perph2.40
DISPLAY.TOUCH.IRQ_Perph3: XS2_Perph3.40
DISPLAY.TOUCH.IRQ_Perph4: P1_RPiCONN4.14 XS2_Perph4.40
DISPLAY.TOUCH.IRQ_Perph5: XS2_Perph5.40
DISPLAY.TOUCH.IRQ_Perph6: XS2_Perph6.40
DISPLAY.TOUCH.IRQ_Perph7: XS2_Perph7.40
DISPLAY.TOUCH.IRQ_Perph8: XS2_Perph8.40
DISPLAY.TOUCH.IRQ_Perph9: P1_RPiCONN9.20 XS2_Perph9.40
DISPLAY.TOUCH.SPI.nCE_Perph1: XS2.35
DISPLAY.TOUCH.SPI.nCE_Perph2: P1_RPiCONN2.5 XS2_Perph2.35
DISPLAY.TOUCH.SPI.nCE_Perph3: XS2_Perph3.35
DISPLAY.TOUCH.SPI.nCE_Perph4: P1_RPiCONN4.5 XS2_Perph4.35
DISPLAY.TOUCH.SPI.nCE_Perph5: XS2_Perph5.35
DISPLAY.TOUCH.SPI.nCE_Perph6: XS2_Perph6.35
DISPLAY.TOUCH.SPI.nCE_Perph7: XS2_Perph7.35
DISPLAY.TOUCH.SPI.nCE_Perph8: XS2_Perph8.35
DISPLAY.TOUCH.SPI.nCE_Perph9: P1_RPiCONN9.12 XS2_Perph9.35
ENCODER.A_Perph1: XS2.9
ENCODER.A_Perph2: XS2_Perph2.9
ENCODER.A_Perph3: XS2_Perph3.9
ENCODER.A_Perph4: P1_RPiCONN4.22 XS2_Perph4.9
ENCODER.A_Perph5: XS2_Perph5.9
ENCODER.A_Perph6: P1_RPiCONN6.11 XS2_Perph6.9
ENCODER.A_Perph7: XS2_Perph7.9
ENCODER.A_Perph8: XS2_Perph8.9
ENCODER.A_Perph9: XS2_Perph9.9
ENCODER.B_Perph1: XS2.10
ENCODER.B_Perph2: XS2_Perph2.10
ENCODER.B_Perph3: XS2_Perph3.10
ENCODER.B_Perph4: P1_RPiCONN4.21 XS2_Perph4.10
ENCODER.B_Perph5: XS2_Perph5.10
ENCODER.B_Perph6: P1_RPiCONN6.13 XS2_Perph6.10
ENCODER.B_Perph7: XS2_Perph7.10
ENCODER.B_Perph8: XS2_Perph8.10
ENCODER.B_Perph9: XS2_Perph9.10
ENCODER.BTN_Perph1: XS2.11
ENCODER.BTN_Perph2: XS2_Perph2.11
ENCODER.BTN_Perph3: XS2_Perph3.11
ENCODER.BTN_Perph4: P1_RPiCONN4.20 XS2_Perph4.11
ENCODER.BTN_Perph5: XS2_Perph5.11
ENCODER.BTN_Perph6: P1_RPiCONN6.16 XS2_Perph6.11
ENCODER.BTN_Perph7: XS2_Perph7.11
ENCODER.BTN_Perph8: XS2_Perph8.11
ENCODER.BTN_Perph9: XS2_Perph9.11
ENCODER.SWT_Perph1: XS2.12
ENCODER.SWT_Perph2: XS2_Perph2.12
ENCODER.SWT_Perph3: XS2_Perph3.12
ENCODER.SWT_Perph4: P1_RPiCONN4.19 XS2_Perph4.12
ENCODER.SWT_Perph5: XS2_Perph5.12
ENCODER.SWT_Perph6: P1_RPiCONN6.14 XS2_Perph6.12
ENCODER.SWT_Perph7: XS2_Perph7.12
ENCODER.SWT_Perph8: XS2_Perph8.12
ENCODER.SWT_Perph9: XS2_Perph9.12
GND?: R2.2
GYROSCOPE.CS_Perph1: XS1.7
GYROSCOPE.CS_Perph2: XS1_Perph2.7
GYROSCOPE.CS_Perph3: XS1_Perph3.7
GYROSCOPE.CS_Perph4: XS1_Perph4.7
GYROSCOPE.CS_Perph5: P1_RPiCONN5.16 XS1_Perph5.7
GYROSCOPE.CS_Perph6: XS1_Perph6.7
GYROSCOPE.CS_Perph7: XS1_Perph7.7
GYROSCOPE.CS_Perph8: XS1_Perph8.7
GYROSCOPE.CS_Perph9: XS1_Perph9.7
GYROSCOPE.DR_Perph1: XS1.6
GYROSCOPE.DR_Perph2: XS1_Perph2.6
GYROSCOPE.DR_Perph3: XS1_Perph3.6
GYROSCOPE.DR_Perph4: XS1_Perph4.6
GYROSCOPE.DR_Perph5: P1_RPiCONN5.13 XS1_Perph5.6
GYROSCOPE.DR_Perph6: XS1_Perph6.6
GYROSCOPE.DR_Perph7: XS1_Perph7.6
GYROSCOPE.DR_Perph8: XS1_Perph8.6
GYROSCOPE.DR_Perph9: XS1_Perph9.6
GYROSCOPE.INT_Perph1: XS1.5
GYROSCOPE.INT_Perph2: XS1_Perph2.5
GYROSCOPE.INT_Perph3: XS1_Perph3.5
GYROSCOPE.INT_Perph4: XS1_Perph4.5
GYROSCOPE.INT_Perph5: P1_RPiCONN5.11 XS1_Perph5.5
GYROSCOPE.INT_Perph6: XS1_Perph6.5
GYROSCOPE.INT_Perph7: XS1_Perph7.5
GYROSCOPE.INT_Perph8: XS1_Perph8.5
GYROSCOPE.INT_Perph9: XS1_Perph9.5
GYROSCOPE.SDO_Perph1: XS1.8
GYROSCOPE.SDO_Perph2: XS1_Perph2.8
GYROSCOPE.SDO_Perph3: XS1_Perph3.8
GYROSCOPE.SDO_Perph4: XS1_Perph4.8
GYROSCOPE.SDO_Perph5: P1_RPiCONN5.14 XS1_Perph5.8
GYROSCOPE.SDO_Perph6: XS1_Perph6.8
GYROSCOPE.SDO_Perph7: XS1_Perph7.8
GYROSCOPE.SDO_Perph8: XS1_Perph8.8
GYROSCOPE.SDO_Perph9: XS1_Perph9.8
KEYPAD.Col0_Perph1: XS2.16
KEYPAD.Col0_Perph2: XS2_Perph2.16
KEYPAD.Col0_Perph3: XS2_Perph3.16
KEYPAD.Col0_Perph4: XS2_Perph4.16
KEYPAD.Col0_Perph5: XS2_Perph5.16
KEYPAD.Col0_Perph6: P1_RPiCONN6.8 XS2_Perph6.16
KEYPAD.Col0_Perph7: XS2_Perph7.16
KEYPAD.Col0_Perph8: P1_RPiCONN8.13 XS2_Perph8.16
KEYPAD.Col0_Perph9: XS2_Perph9.16
KEYPAD.Col1_Perph1: XS2.13
KEYPAD.Col1_Perph2: XS2_Perph2.13
KEYPAD.Col1_Perph3: XS2_Perph3.13
KEYPAD.Col1_Perph4: XS2_Perph4.13
KEYPAD.Col1_Perph5: XS2_Perph5.13
KEYPAD.Col1_Perph6: P1_RPiCONN6.9 XS2_Perph6.13
KEYPAD.Col1_Perph7: XS2_Perph7.13
KEYPAD.Col1_Perph8: P1_RPiCONN8.16 XS2_Perph8.13
KEYPAD.Col1_Perph9: XS2_Perph9.13
KEYPAD.Col2_Perph1: XS2.18
KEYPAD.Col2_Perph2: XS2_Perph2.18
KEYPAD.Col2_Perph3: XS2_Perph3.18
KEYPAD.Col2_Perph4: XS2_Perph4.18
KEYPAD.Col2_Perph5: XS2_Perph5.18
KEYPAD.Col2_Perph6: P1_RPiCONN6.10 XS2_Perph6.18
KEYPAD.Col2_Perph7: XS2_Perph7.18
KEYPAD.Col2_Perph8: P1_RPiCONN8.14 XS2_Perph8.18
KEYPAD.Col2_Perph9: XS2_Perph9.18
KEYPAD.Row0_Perph1: XS2.15
KEYPAD.Row0_Perph2: XS2_Perph2.15
KEYPAD.Row0_Perph3: XS2_Perph3.15
KEYPAD.Row0_Perph4: XS2_Perph4.15
KEYPAD.Row0_Perph5: XS2_Perph5.15
KEYPAD.Row0_Perph6: P1_RPiCONN6.7 XS2_Perph6.15
KEYPAD.Row0_Perph7: XS2_Perph7.15
KEYPAD.Row0_Perph8: P1_RPiCONN8.11 XS2_Perph8.15
KEYPAD.Row0_Perph9: XS2_Perph9.15
KEYPAD.Row1_Perph1: XS2.20
KEYPAD.Row1_Perph2: XS2_Perph2.20
KEYPAD.Row1_Perph3: XS2_Perph3.20
KEYPAD.Row1_Perph4: XS2_Perph4.20
KEYPAD.Row1_Perph5: XS2_Perph5.20
KEYPAD.Row1_Perph6: P1_RPiCONN6.5 XS2_Perph6.20
KEYPAD.Row1_Perph7: XS2_Perph7.20
KEYPAD.Row1_Perph8: P1_RPiCONN8.12 XS2_Perph8.20
KEYPAD.Row1_Perph9: XS2_Perph9.20
KEYPAD.Row2_Perph1: XS2.19
KEYPAD.Row2_Perph2: XS2_Perph2.19
KEYPAD.Row2_Perph3: XS2_Perph3.19
KEYPAD.Row2_Perph4: XS2_Perph4.19
KEYPAD.Row2_Perph5: XS2_Perph5.19
KEYPAD.Row2_Perph6: P1_RPiCONN6.6 XS2_Perph6.19
KEYPAD.Row2_Perph7: XS2_Perph7.19
KEYPAD.Row2_Perph8: P1_RPiCONN8.21 XS2_Perph8.19
KEYPAD.Row2_Perph9: XS2_Perph9.19
KEYPAD.Row3_Perph1: XS2.17
KEYPAD.Row3_Perph2: XS2_Perph2.17
KEYPAD.Row3_Perph3: XS2_Perph3.17
KEYPAD.Row3_Perph4: XS2_Perph4.17
KEYPAD.Row3_Perph5: XS2_Perph5.17
KEYPAD.Row3_Perph6: P1_RPiCONN6.12 XS2_Perph6.17
KEYPAD.Row3_Perph7: XS2_Perph7.17
KEYPAD.Row3_Perph8: P1_RPiCONN8.22 XS2_Perph8.17
KEYPAD.Row3_Perph9: XS2_Perph9.17
MICROPHONE_DS_Perph1: P1.22 XS2.8
MICROPHONE_DS_Perph2: XS2_Perph2.8
MICROPHONE_DS_Perph3: XS2_Perph3.8
MICROPHONE_DS_Perph4: XS2_Perph4.8
MICROPHONE_DS_Perph5: XS2_Perph5.8
MICROPHONE_DS_Perph6: XS2_Perph6.8
MICROPHONE_DS_Perph7: XS2_Perph7.8
MICROPHONE_DS_Perph8: XS2_Perph8.8
MICROPHONE_DS_Perph9: XS2_Perph9.8
NAV.DRDY_M_Perph1: XS1.14
NAV.DRDY_M_Perph2: XS1_Perph2.14
NAV.DRDY_M_Perph3: XS1_Perph3.14
NAV.DRDY_M_Perph4: XS1_Perph4.14
NAV.DRDY_M_Perph5: XS1_Perph5.14
NAV.DRDY_M_Perph6: XS1_Perph6.14
NAV.DRDY_M_Perph7: XS1_Perph7.14
NAV.DRDY_M_Perph8: XS1_Perph8.14
NAV.DRDY_M_Perph9: P1_RPiCONN9.17 XS1_Perph9.14
NAV.INT_Perph1: XS1.13
NAV.INT_Perph2: XS1_Perph2.13
NAV.INT_Perph3: XS1_Perph3.13
NAV.INT_Perph4: XS1_Perph4.13
NAV.INT_Perph5: XS1_Perph5.13
NAV.INT_Perph6: XS1_Perph6.13
NAV.INT_Perph7: XS1_Perph7.13
NAV.INT_Perph8: XS1_Perph8.13
NAV.INT_Perph9: P1_RPiCONN9.18 XS1_Perph9.13
NAV.SPI_3CS.MISO_Perph1: XS1.12
NAV.SPI_3CS.MISO_Perph2: XS1_Perph2.12
NAV.SPI_3CS.MISO_Perph3: XS1_Perph3.12
NAV.SPI_3CS.MISO_Perph4: XS1_Perph4.12
NAV.SPI_3CS.MISO_Perph5: XS1_Perph5.12
NAV.SPI_3CS.MISO_Perph6: XS1_Perph6.12
NAV.SPI_3CS.MISO_Perph7: XS1_Perph7.12
NAV.SPI_3CS.MISO_Perph8: XS1_Perph8.12
NAV.SPI_3CS.MISO_Perph9: P1_RPiCONN9.10 XS1_Perph9.12
NAV.SPI_3CS.MOSI_Perph1: XS1.9
NAV.SPI_3CS.MOSI_Perph2: XS1_Perph2.9
NAV.SPI_3CS.MOSI_Perph3: XS1_Perph3.9
NAV.SPI_3CS.MOSI_Perph4: XS1_Perph4.9
NAV.SPI_3CS.MOSI_Perph5: XS1_Perph5.9
NAV.SPI_3CS.MOSI_Perph6: XS1_Perph6.9
NAV.SPI_3CS.MOSI_Perph7: XS1_Perph7.9
NAV.SPI_3CS.MOSI_Perph8: XS1_Perph8.9
NAV.SPI_3CS.MOSI_Perph9: P1_RPiCONN9.9 XS1_Perph9.9
NAV.SPI_3CS.nCE0_Perph1: XS1.10
NAV.SPI_3CS.nCE0_Perph2: XS1_Perph2.10
NAV.SPI_3CS.nCE0_Perph3: XS1_Perph3.10
NAV.SPI_3CS.nCE0_Perph4: XS1_Perph4.10
NAV.SPI_3CS.nCE0_Perph5: XS1_Perph5.10
NAV.SPI_3CS.nCE0_Perph6: XS1_Perph6.10
NAV.SPI_3CS.nCE0_Perph7: XS1_Perph7.10
NAV.SPI_3CS.nCE0_Perph8: XS1_Perph8.10
NAV.SPI_3CS.nCE0_Perph9: P1_RPiCONN9.7 XS1_Perph9.10
NAV.SPI_3CS.nCE1_Perph1: XS1.15
NAV.SPI_3CS.nCE1_Perph2: XS1_Perph2.15
NAV.SPI_3CS.nCE1_Perph3: XS1_Perph3.15
NAV.SPI_3CS.nCE1_Perph4: XS1_Perph4.15
NAV.SPI_3CS.nCE1_Perph5: XS1_Perph5.15
NAV.SPI_3CS.nCE1_Perph6: XS1_Perph6.15
NAV.SPI_3CS.nCE1_Perph7: XS1_Perph7.15
NAV.SPI_3CS.nCE1_Perph8: XS1_Perph8.15
NAV.SPI_3CS.nCE1_Perph9: P1_RPiCONN9.5 XS1_Perph9.15
NAV.SPI_3CS.nCE2_Perph1: XS1.16
NAV.SPI_3CS.nCE2_Perph2: XS1_Perph2.16
NAV.SPI_3CS.nCE2_Perph3: XS1_Perph3.16
NAV.SPI_3CS.nCE2_Perph4: XS1_Perph4.16
NAV.SPI_3CS.nCE2_Perph5: XS1_Perph5.16
NAV.SPI_3CS.nCE2_Perph6: XS1_Perph6.16
NAV.SPI_3CS.nCE2_Perph7: XS1_Perph7.16
NAV.SPI_3CS.nCE2_Perph8: XS1_Perph8.16
NAV.SPI_3CS.nCE2_Perph9: P1_RPiCONN9.6 XS1_Perph9.16
NAV.SPI_3CS.SCLK_Perph1: XS1.11
NAV.SPI_3CS.SCLK_Perph2: XS1_Perph2.11
NAV.SPI_3CS.SCLK_Perph3: XS1_Perph3.11
NAV.SPI_3CS.SCLK_Perph4: XS1_Perph4.11
NAV.SPI_3CS.SCLK_Perph5: XS1_Perph5.11
NAV.SPI_3CS.SCLK_Perph6: XS1_Perph6.11
NAV.SPI_3CS.SCLK_Perph7: XS1_Perph7.11
NAV.SPI_3CS.SCLK_Perph8: XS1_Perph8.11
NAV.SPI_3CS.SCLK_Perph9: P1_RPiCONN9.8 XS1_Perph9.11
NetP1_RPiCONN1_1: P1.1
NetP1_RPiCONN1_2: P1.2
NetP1_RPiCONN1_15: P1.15
NetP1_RPiCONN2_1: P1_RPiCONN2.1
NetP1_RPiCONN2_2: P1_RPiCONN2.2
NetP1_RPiCONN2_15: P1_RPiCONN2.15
NetP1_RPiCONN3_1: P1_RPiCONN3.1
NetP1_RPiCONN3_2: P1_RPiCONN3.2
NetP1_RPiCONN3_15: P1_RPiCONN3.15
NetP1_RPiCONN4_1: P1_RPiCONN4.1
NetP1_RPiCONN4_2: P1_RPiCONN4.2
NetP1_RPiCONN4_15: P1_RPiCONN4.15
NetP1_RPiCONN5_1: P1_RPiCONN5.1
NetP1_RPiCONN5_2: P1_RPiCONN5.2
NetP1_RPiCONN5_15: P1_RPiCONN5.15
NetP1_RPiCONN6_1: P1_RPiCONN6.1
NetP1_RPiCONN6_2: P1_RPiCONN6.2
NetP1_RPiCONN6_15: P1_RPiCONN6.15
NetP1_RPiCONN7_1: P1_RPiCONN7.1
NetP1_RPiCONN7_2: P1_RPiCONN7.2
NetP1_RPiCONN7_15: P1_RPiCONN7.15
NetP1_RPiCONN8_1: P1_RPiCONN8.1
NetP1_RPiCONN8_2: P1_RPiCONN8.2
NetP1_RPiCONN8_15: P1_RPiCONN8.15
NetP1_RPiCONN9_1: P1_RPiCONN9.1
NetP1_RPiCONN9_2: P1_RPiCONN9.2
NetP1_RPiCONN9_15: P1_RPiCONN9.15
PGND_Perph1: XS2.3 XS2.4 XS2.14 XS2.39
PGND_Perph2: XS2_Perph2.3 XS2_Perph2.4 XS2_Perph2.14 XS2_Perph2.39
PGND_Perph3: XS2_Perph3.3 XS2_Perph3.4 XS2_Perph3.14 XS2_Perph3.39
PGND_Perph4: XS2_Perph4.3 XS2_Perph4.4 XS2_Perph4.14 XS2_Perph4.39
PGND_Perph5: XS2_Perph5.3 XS2_Perph5.4 XS2_Perph5.14 XS2_Perph5.39
PGND_Perph6: XS2_Perph6.3 XS2_Perph6.4 XS2_Perph6.14 XS2_Perph6.39
PGND_Perph7: XS2_Perph7.3 XS2_Perph7.4 XS2_Perph7.14 XS2_Perph7.39
PGND_Perph8: XS2_Perph8.3 XS2_Perph8.4 XS2_Perph8.14 XS2_Perph8.39
PGND_Perph9: XS2_Perph9.3 XS2_Perph9.4 XS2_Perph9.14 XS2_Perph9.39
RFID.IRQ_Perph1: XS2.25
RFID.IRQ_Perph2: XS2_Perph2.25
RFID.IRQ_Perph3: XS2_Perph3.25
RFID.IRQ_Perph4: XS2_Perph4.25
RFID.IRQ_Perph5: XS2_Perph5.25
RFID.IRQ_Perph6: XS2_Perph6.25
RFID.IRQ_Perph7: XS2_Perph7.25
RFID.IRQ_Perph8: P1_RPiCONN8.17 XS2_Perph8.25
RFID.IRQ_Perph9: XS2_Perph9.25
RFID.RST_Perph1: XS2.26
RFID.RST_Perph2: XS2_Perph2.26
RFID.RST_Perph3: XS2_Perph3.26
RFID.RST_Perph4: XS2_Perph4.26
RFID.RST_Perph5: XS2_Perph5.26
RFID.RST_Perph6: XS2_Perph6.26
RFID.RST_Perph7: XS2_Perph7.26
RFID.RST_Perph8: P1_RPiCONN8.18 XS2_Perph8.26
RFID.RST_Perph9: XS2_Perph9.26
RFID.SPI.MISO_Perph1: XS2.28
RFID.SPI.MISO_Perph2: XS2_Perph2.28
RFID.SPI.MISO_Perph3: XS2_Perph3.28
RFID.SPI.MISO_Perph4: XS2_Perph4.28
RFID.SPI.MISO_Perph5: XS2_Perph5.28
RFID.SPI.MISO_Perph6: XS2_Perph6.28
RFID.SPI.MISO_Perph7: XS2_Perph7.28
RFID.SPI.MISO_Perph9: XS2_Perph9.28
RFID.SPI.MOSI_Perph1: XS2.27
RFID.SPI.MOSI_Perph2: XS2_Perph2.27
RFID.SPI.MOSI_Perph3: XS2_Perph3.27
RFID.SPI.MOSI_Perph4: XS2_Perph4.27
RFID.SPI.MOSI_Perph5: XS2_Perph5.27
RFID.SPI.MOSI_Perph6: XS2_Perph6.27
RFID.SPI.MOSI_Perph7: XS2_Perph7.27
RFID.SPI.MOSI_Perph9: XS2_Perph9.27
RFID.SPI.nCE_Perph1: XS2.29
RFID.SPI.nCE_Perph2: XS2_Perph2.29
RFID.SPI.nCE_Perph3: XS2_Perph3.29
RFID.SPI.nCE_Perph4: XS2_Perph4.29
RFID.SPI.nCE_Perph5: XS2_Perph5.29
RFID.SPI.nCE_Perph6: XS2_Perph6.29
RFID.SPI.nCE_Perph7: XS2_Perph7.29
RFID.SPI.nCE_Perph8: P1_RPiCONN8.5 XS2_Perph8.29
RFID.SPI.nCE_Perph9: XS2_Perph9.29
RFID.SPI.SCLK_Perph1: XS2.30
RFID.SPI.SCLK_Perph2: XS2_Perph2.30
RFID.SPI.SCLK_Perph3: XS2_Perph3.30
RFID.SPI.SCLK_Perph4: XS2_Perph4.30
RFID.SPI.SCLK_Perph5: XS2_Perph5.30
RFID.SPI.SCLK_Perph6: XS2_Perph6.30
RFID.SPI.SCLK_Perph7: XS2_Perph7.30
RFID.SPI.SCLK_Perph9: XS2_Perph9.30
RPi_GPIO.GPIO08_RPiCONN2: P1_RPiCONN2.22 XS2_Perph2.23
RPi_GPIO.GPIO08_RPiCONN5: P1_RPiCONN5.22 XS1_Perph5.4
RPi_GPIO.GPIO08_RPiCONN6: P1_RPiCONN6.22 XS1_Perph6.4
RPi_GPIO.GPIO08_RPiCONN7: P1_RPiCONN7.22 XS2_Perph7.23
RPi_GPIO.GPIO08_RPiCONN9: P1_RPiCONN9.22 XS2_Perph9.23
RPi_GPIO.GPIO11_RPiCONN2: P1_RPiCONN2.21 XS2_Perph2.24
RPi_GPIO.GPIO11_RPiCONN5: P1_RPiCONN5.21 XS1_Perph5.3
RPi_GPIO.GPIO11_RPiCONN6: P1_RPiCONN6.21 XS1_Perph6.3
RPi_GPIO.GPIO11_RPiCONN7: P1_RPiCONN7.21 XS2_Perph7.24
RPi_GPIO.GPIO11_RPiCONN9: P1_RPiCONN9.21 XS2_Perph9.24
RPi_GPIO.GPIO12_RPiCONN1: P1.17
RPi_GPIO.GPIO12_RPiCONN2: P1_RPiCONN2.17
RPi_GPIO.GPIO12_RPiCONN3: P1_RPiCONN3.17
RPi_GPIO.GPIO12_RPiCONN4: P1_RPiCONN4.17
RPi_GPIO.GPIO12_RPiCONN5: P1_RPiCONN5.17
RPi_GPIO.GPIO12_RPiCONN6: P1_RPiCONN6.17
RPi_GPIO.GPIO12_RPiCONN7: P1_RPiCONN7.17
RPi_GPIO.GPIO13_RPiCONN1: P1.18
RPi_GPIO.GPIO13_RPiCONN2: P1_RPiCONN2.18
RPi_GPIO.GPIO13_RPiCONN3: P1_RPiCONN3.18
RPi_GPIO.GPIO13_RPiCONN4: P1_RPiCONN4.18
RPi_GPIO.GPIO13_RPiCONN5: P1_RPiCONN5.18
RPi_GPIO.GPIO13_RPiCONN6: P1_RPiCONN6.18
RPi_GPIO.GPIO13_RPiCONN7: P1_RPiCONN7.18
RPi_GPIO.GPIO26_RPiCONN1: P1.20
RPi_GPIO.GPIO26_RPiCONN2: P1_RPiCONN2.20
RPi_GPIO.GPIO26_RPiCONN3: P1_RPiCONN3.20
RPi_GPIO.GPIO26_RPiCONN5: P1_RPiCONN5.20 XS1_Perph5.2
RPi_GPIO.GPIO26_RPiCONN6: P1_RPiCONN6.20 XS1_Perph6.2
RPi_GPIO.GPIO26_RPiCONN7: P1_RPiCONN7.20 XS2_Perph7.22
RPi_GPIO.GPIO27_RPiCONN1: P1.19
RPi_GPIO.GPIO27_RPiCONN2: P1_RPiCONN2.19
RPi_GPIO.GPIO27_RPiCONN3: P1_RPiCONN3.19
RPi_GPIO.GPIO27_RPiCONN5: P1_RPiCONN5.19 XS1_Perph5.1
RPi_GPIO.GPIO27_RPiCONN6: P1_RPiCONN6.19 XS1_Perph6.1
RPi_GPIO.GPIO27_RPiCONN7: P1_RPiCONN7.19 XS2_Perph7.21
RPi_I2C.SCL_RPiCONN1: P1.3
RPi_I2C.SCL_RPiCONN2: P1_RPiCONN2.3
RPi_I2C.SCL_RPiCONN3: P1_RPiCONN3.3
RPi_I2C.SCL_RPiCONN4: P1_RPiCONN4.3
RPi_I2C.SCL_RPiCONN5: P1_RPiCONN5.3
RPi_I2C.SCL_RPiCONN6: P1_RPiCONN6.3
RPi_I2C.SCL_RPiCONN7: P1_RPiCONN7.3
RPi_I2C.SCL_RPiCONN8: P1_RPiCONN8.3
RPi_I2C.SCL_RPiCONN9: P1_RPiCONN9.3
RPi_I2C.SDA_RPiCONN1: P1.4
RPi_I2C.SDA_RPiCONN2: P1_RPiCONN2.4
RPi_I2C.SDA_RPiCONN3: P1_RPiCONN3.4
RPi_I2C.SDA_RPiCONN4: P1_RPiCONN4.4
RPi_I2C.SDA_RPiCONN5: P1_RPiCONN5.4
RPi_I2C.SDA_RPiCONN6: P1_RPiCONN6.4
RPi_I2C.SDA_RPiCONN7: P1_RPiCONN7.4
RPi_I2C.SDA_RPiCONN8: P1_RPiCONN8.4
RPi_I2C.SDA_RPiCONN9: P1_RPiCONN9.4
RPi_SPI1.MISO_RPiCONN1: P1.10
RPi_SPI1.MISO_RPiCONN3: P1_RPiCONN3.10
RPi_SPI1.MISO_RPiCONN5: P1_RPiCONN5.10
RPi_SPI1.MISO_RPiCONN7: P1_RPiCONN7.10
RPi_SPI1.MOSI_RPiCONN1: P1.9
RPi_SPI1.MOSI_RPiCONN3: P1_RPiCONN3.9
RPi_SPI1.MOSI_RPiCONN5: P1_RPiCONN5.9
RPi_SPI1.MOSI_RPiCONN7: P1_RPiCONN7.9
RPi_SPI1.nCE0_RPiCONN1: P1.7
RPi_SPI1.nCE0_RPiCONN3: P1_RPiCONN3.7
RPi_SPI1.nCE0_RPiCONN5: P1_RPiCONN5.7
RPi_SPI1.nCE0_RPiCONN7: P1_RPiCONN7.7
RPi_SPI1.nCE1_RPiCONN1: P1.5
RPi_SPI1.nCE1_RPiCONN3: P1_RPiCONN3.5
RPi_SPI1.nCE1_RPiCONN5: P1_RPiCONN5.5
RPi_SPI1.nCE1_RPiCONN7: P1_RPiCONN7.5
RPi_SPI1.nCE2_RPiCONN1: P1.6
RPi_SPI1.nCE2_RPiCONN3: P1_RPiCONN3.6
RPi_SPI1.nCE2_RPiCONN5: P1_RPiCONN5.6
RPi_SPI1.nCE2_RPiCONN7: P1_RPiCONN7.6
RPi_SPI1.SCLK_RPiCONN1: P1.8
RPi_SPI1.SCLK_RPiCONN3: P1_RPiCONN3.8
RPi_SPI1.SCLK_RPiCONN5: P1_RPiCONN5.8
RPi_SPI1.SCLK_RPiCONN7: P1_RPiCONN7.8
RPi_SPI4.MISO_RPiCONN1: P1.13
RPi_SPI4.MISO_RPiCONN3: P1_RPiCONN3.13
RPi_SPI4.MISO_RPiCONN7: P1_RPiCONN7.13
RPi_SPI4.MOSI_RPiCONN1: P1.16
RPi_SPI4.MOSI_RPiCONN3: P1_RPiCONN3.16
RPi_SPI4.MOSI_RPiCONN7: P1_RPiCONN7.16
RPi_SPI4.nCE0_RPiCONN1: P1.11
RPi_SPI4.nCE0_RPiCONN2: P1_RPiCONN2.11
RPi_SPI4.nCE0_RPiCONN3: P1_RPiCONN3.11
RPi_SPI4.nCE0_RPiCONN4: P1_RPiCONN4.11
RPi_SPI4.nCE0_RPiCONN7: P1_RPiCONN7.11
RPi_SPI4.nCE1_RPiCONN1: P1.12
RPi_SPI4.nCE1_RPiCONN2: P1_RPiCONN2.12
RPi_SPI4.nCE1_RPiCONN3: P1_RPiCONN3.12
RPi_SPI4.nCE1_RPiCONN4: P1_RPiCONN4.12
RPi_SPI4.nCE1_RPiCONN5: P1_RPiCONN5.12
RPi_SPI4.nCE1_RPiCONN7: P1_RPiCONN7.12
RPi_SPI4.SCLK_RPiCONN1: P1.14
RPi_SPI4.SCLK_RPiCONN3: P1_RPiCONN3.14
RPi_SPI4.SCLK_RPiCONN7: P1_RPiCONN7.14
STEPMOTOR.IN1_Perph1: XS1.4
STEPMOTOR.IN1_Perph2: XS1_Perph2.4
STEPMOTOR.IN1_Perph3: XS1_Perph3.4
STEPMOTOR.IN1_Perph4: XS1_Perph4.4
STEPMOTOR.IN1_Perph7: XS1_Perph7.4
STEPMOTOR.IN1_Perph8: XS1_Perph8.4
STEPMOTOR.IN1_Perph9: XS1_Perph9.4
STEPMOTOR.IN2_Perph1: XS1.3
STEPMOTOR.IN2_Perph2: XS1_Perph2.3
STEPMOTOR.IN2_Perph3: XS1_Perph3.3
STEPMOTOR.IN2_Perph4: XS1_Perph4.3
STEPMOTOR.IN2_Perph7: XS1_Perph7.3
STEPMOTOR.IN2_Perph8: XS1_Perph8.3
STEPMOTOR.IN2_Perph9: XS1_Perph9.3
STEPMOTOR.IN3_Perph1: XS1.2
STEPMOTOR.IN3_Perph2: XS1_Perph2.2
STEPMOTOR.IN3_Perph3: XS1_Perph3.2
STEPMOTOR.IN3_Perph4: XS1_Perph4.2
STEPMOTOR.IN3_Perph7: XS1_Perph7.2
STEPMOTOR.IN3_Perph8: XS1_Perph8.2
STEPMOTOR.IN3_Perph9: XS1_Perph9.2
STEPMOTOR.IN4_Perph1: XS1.1
STEPMOTOR.IN4_Perph2: XS1_Perph2.1
STEPMOTOR.IN4_Perph3: XS1_Perph3.1